# EAGLE board Electrical assignment (EAGLE 7.6.0)

Size 56.82 x 53.33 mm. Coordinates in mm from the lower left corner, seen from the top.
Outline: 0,0 56.82,0 56.82,53.33 0,53.33 0,0
Copper layers (1*16): Top 0.035mm / dielectric 1.5mm / Bottom 0.035mm
Design rules "default": minimum track width 10mil, minimum drill 24mil, track to track 8mil, track to pad 8mil, pad to pad 8mil, via to via 8mil, smd to smd 8mil, copper to edge 40mil, drill to drill 8mil, minimum pad ring 10mil, minimum via ring 8mil, stop-mask expansion 4mil, vias tented up to drill 0mil, thermal gap 10mil

## Footprints (pad centres in the part's own frame; a part is rotated, then mirrored left to right if it is on the bottom)
DC-POWER = drill 0.889 pad 2.54 octagon: + 0,2.54; - 0,-2.54
RADIAL-D11.36MM = drill 1.27 pad 1.905 square: + -2.54,0 | drill 1.27 pad 1.905: - 2.54,0
C5B2.5 = drill 0.813 pad 1.6 octagon: 1 -2.54,0; 2 2.54,0
LED5MM = drill 0.813 octagon: A -1.27,0; K 1.27,0
B25V = drill 0.813 long: A 2.54,0.635; E -2.54,0.635; S 0,0.635
0207/10 = drill 0.813 octagon: 1 -5.08,0; 2 5.08,0
DIL08 = drill 0.813 pad 1.27: 1 -3.81,-3.81; 2 -1.27,-3.81; 3 1.27,-3.81; 4 3.81,-3.81; 5 3.81,3.81; 6 1.27,3.81; 7 -1.27,3.81; 8 -3.81,3.81

## Placement (x,y rotation side)
BAT1  [DC-POWER]  5,10.08 0 top
C2  40uF  [RADIAL-D11.36MM]  5,35.48 0 top
C3  0.01uF  [C5B2.5]  5,48.18 0 top
D1  [LED5MM]  5,98.98 0 top  (outside the outline)
Rpot1  30k‎Ω  [B25V]  5,60.88 0 top  (outside the outline)
Rr1  100‎Ω  [0207/10]  5,73.58 0 top  (outside the outline)
Rr2  1k‎Ω  [0207/10]  5,86.28 0 top  (outside the outline)
U2  [DIL08]  5,22.78 0 top

## Library data of the parts
BAT1 C2 C3 D1 Rpot1 Rr1 Rr2 U2 = AUTODESK_CIRCUITS_BREADBOARD

## Nets
N$1: C3.1 U2.5
N$2: Rr2.1 U2.3
N$3: Rpot1.S Rr1.1 U2.7
N$4: C2.+ Rpot1.A U2.2 U2.6
N$5: D1.A Rr2.2
N$6: BAT1.+ Rr1.2 U2.4 U2.8
N$7: BAT1.- C2.- C3.2 D1.K U2.1

## Tracks (layer width: path | path; a pad name or v marks a point on that pad's centre or on a via)
N$1  (1 unrouted)
N$2  (1 unrouted)
N$3  (2 unrouted)
N$4  (3 unrouted)
N$5  (1 unrouted)
N$6  (3 unrouted)
N$7  (4 unrouted)